# Allegro board 4CHOEI.brd
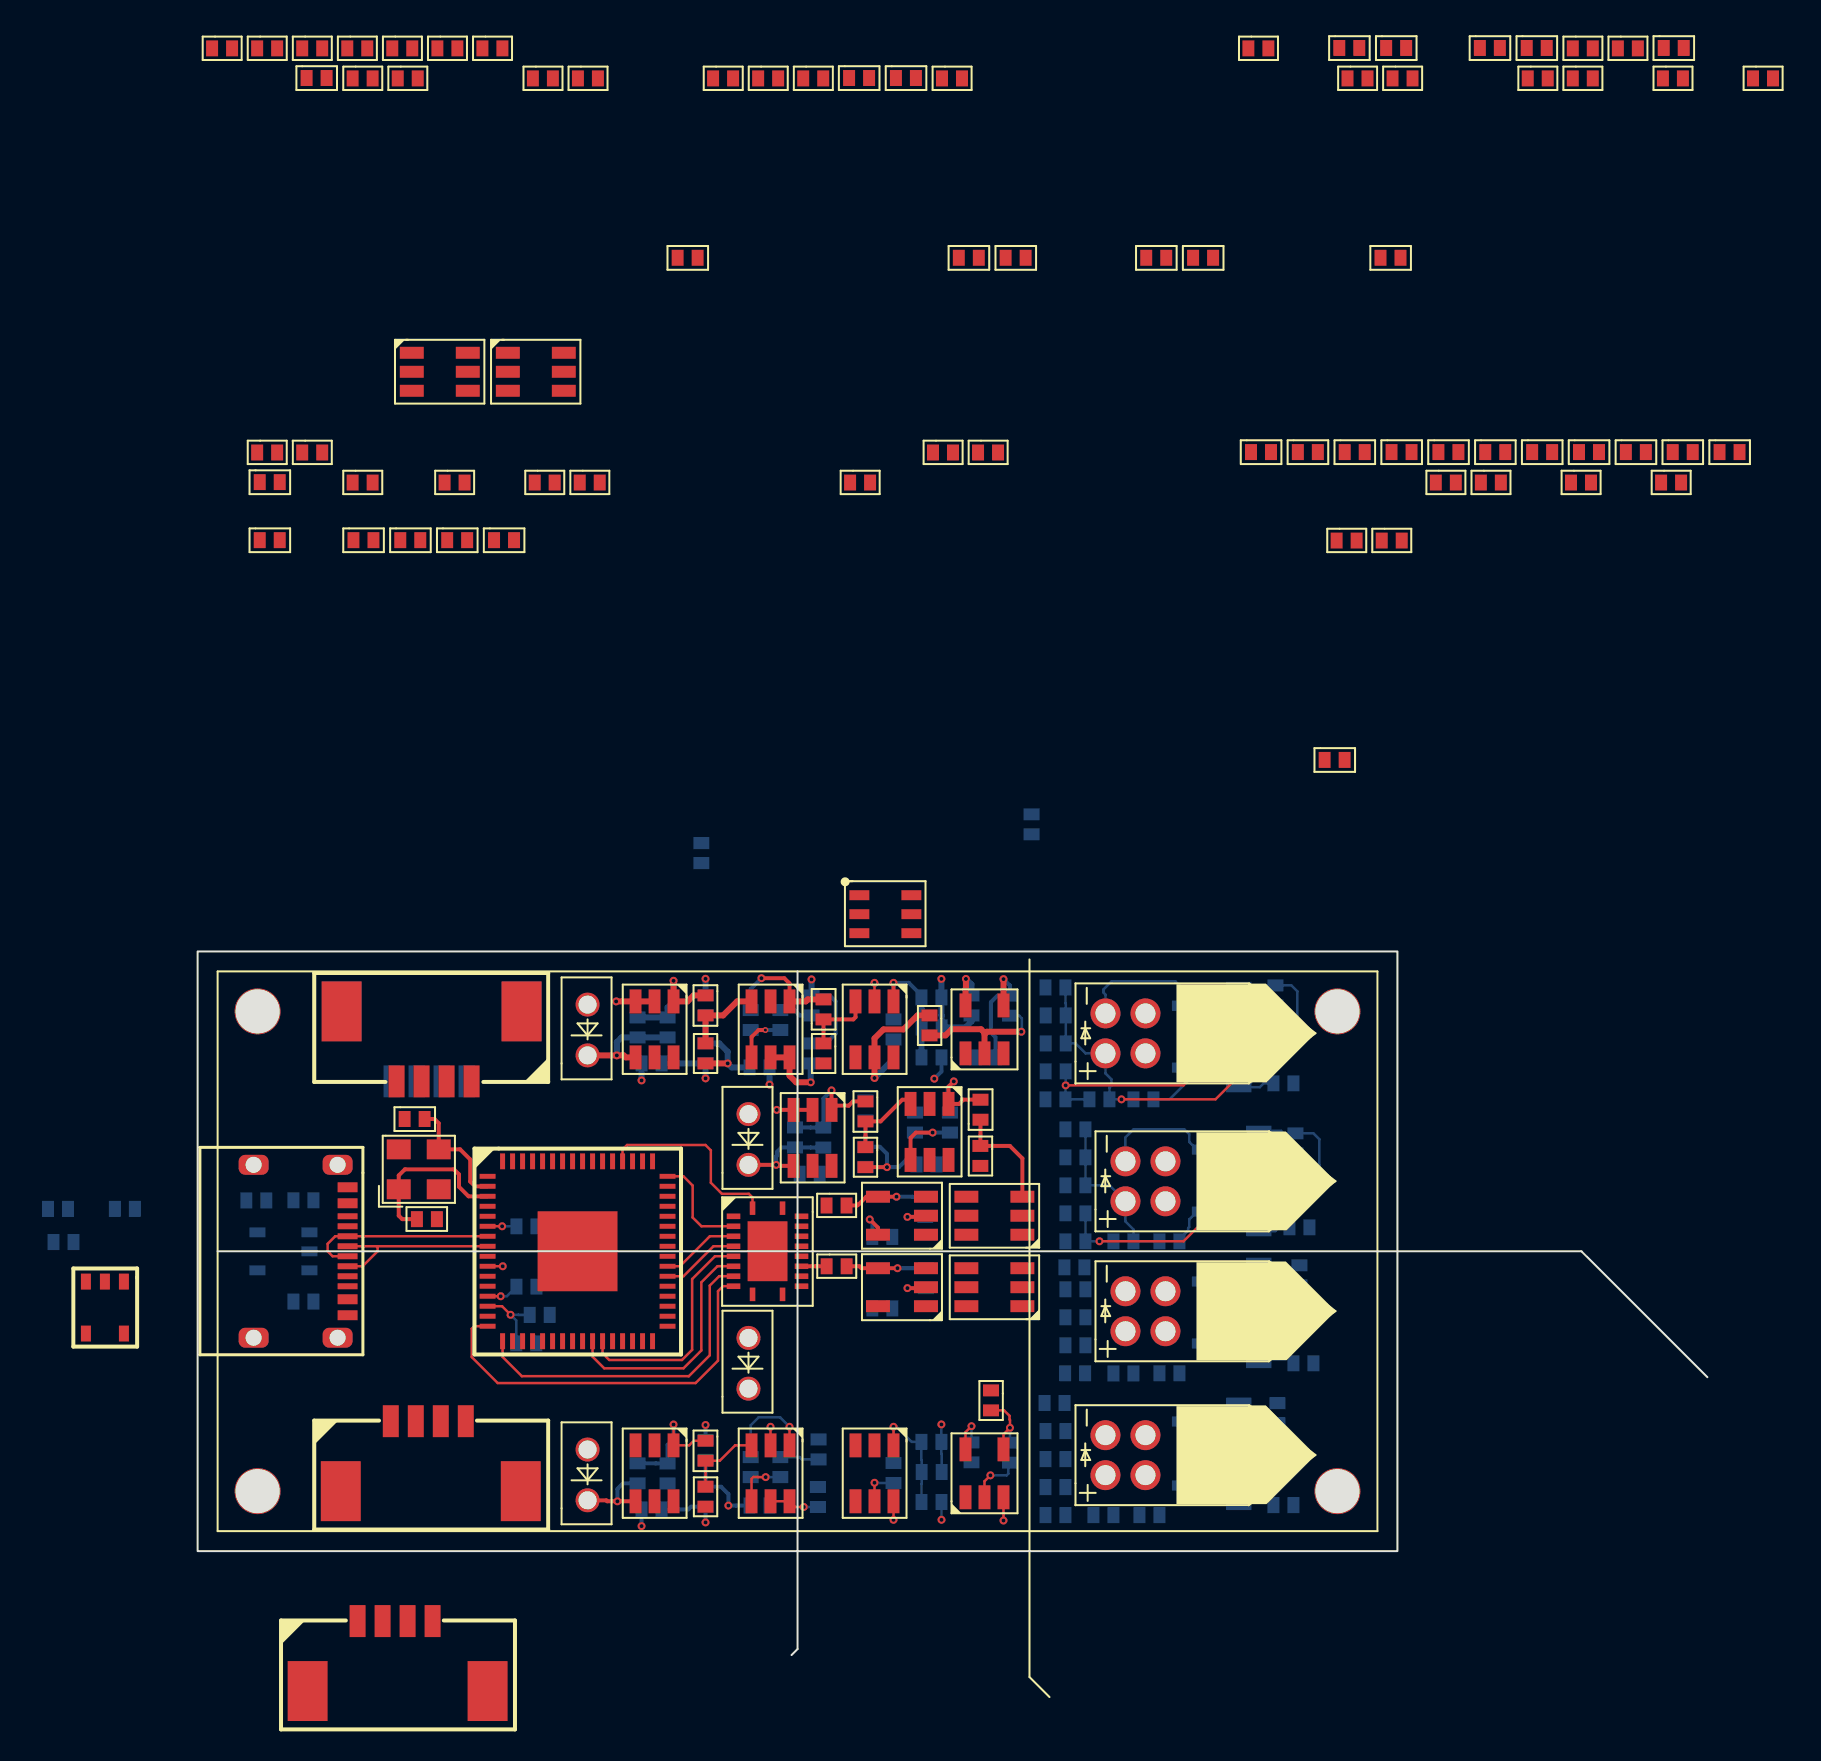
[diagram p0: board, top side]
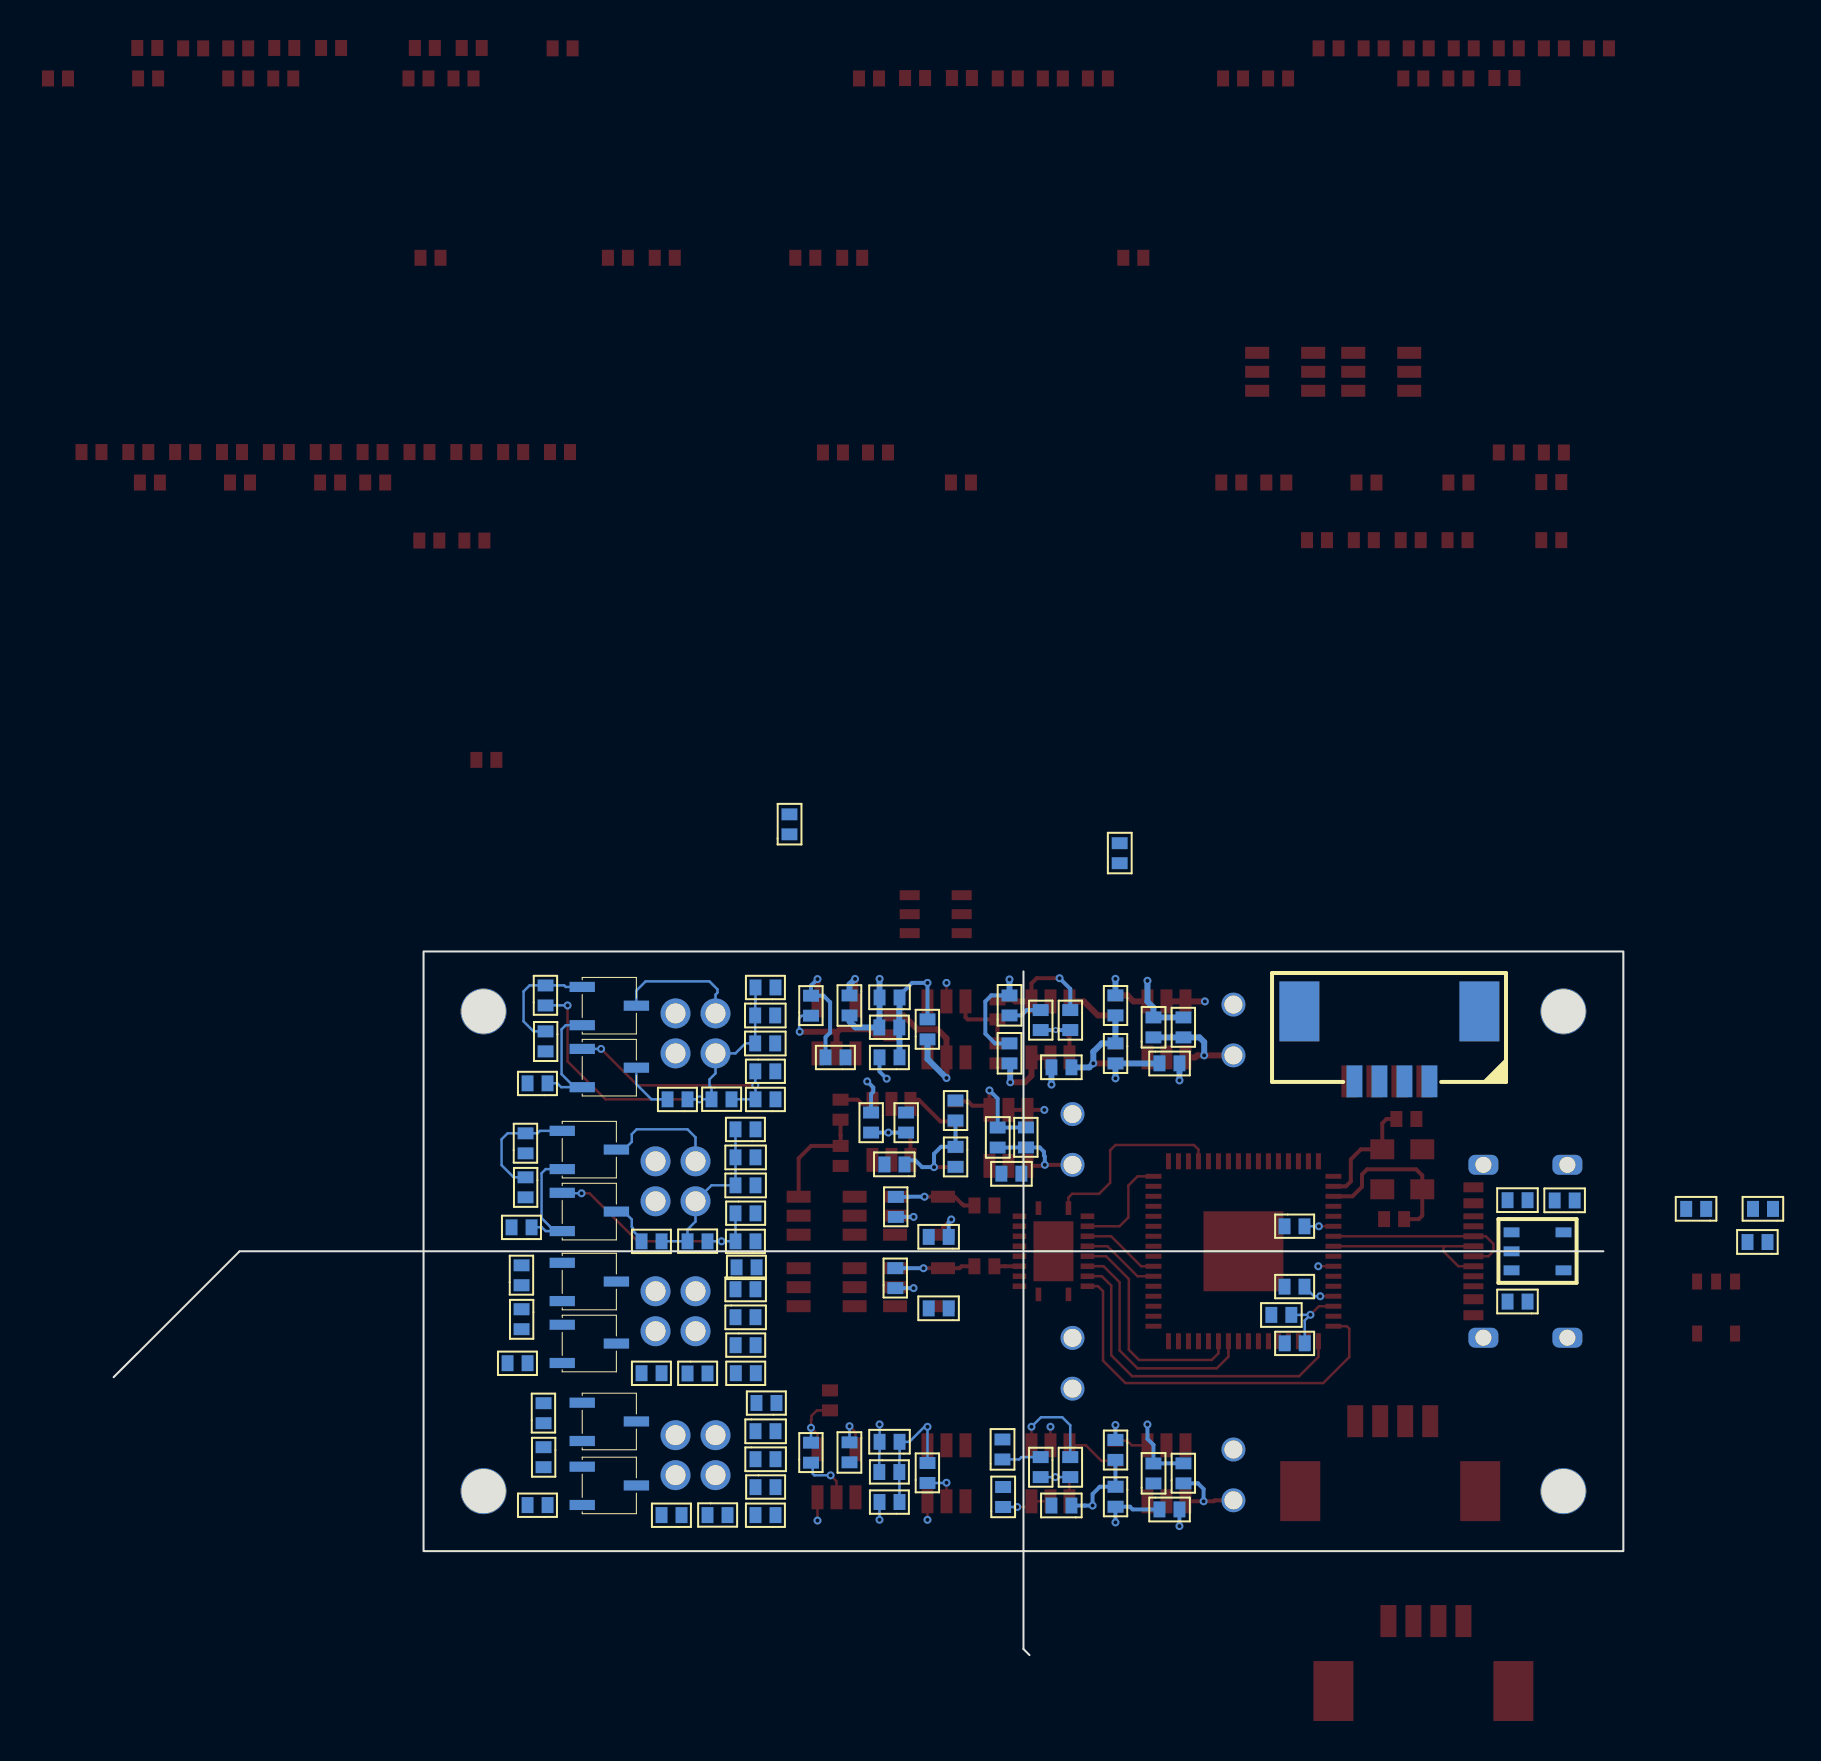
[diagram p1: board, bottom side, seen from below]

Outline 75.5 x 35.2 mm; copper layers: TOP, BOTTOM. Coordinates in mm from the lower left corner of the outline.
Outline path: rectangle 0,5.2 60,35.2 ; 1,20.2 69.2,20.2 75.5,13.9 ; 30,34.2 30,0.3 29.7,0

## Design rules (mm)
constraint set DEFAULT: min track width 0.127
net group TXD_A: nets N931488 N931856 N931860 N931892 TXD_A
net group TXD_B: nets N931500 N931876 N931880 N931896 TXD_B
net group TXD_C: nets N932344 N932712 N932716 N932748 TXD_C
net group TXD_D: nets N932356 N932732 N932736 N932752 TXD_D

## Placement (name value [footprint] x y rotation side)
C1  27pF  [C0402_SMT]  10.35 26.82 0 top
C2  27pF  [C0402_SMT]  11.96 21.81 180 top
C3  0.1uF  [C0402_SMT]  52.68 60.18 0 top
C4  0.1uF  [C0402_SMT]  4.79 22.75 0 bottom
C5  0.1uF  [C0402_SMT]  2.43 22.74 0 bottom
C6  4.7uF  [C0402_SMT]  12.48 55.77 0 top
C7  0.1uF  [C0402_SMT]  17.61 17.02 180 bottom
C8  0.1uF  [C0402_SMT]  7.79 55.77 0 top
C9  4.7uF  [C0402_SMT]  14.82 55.77 0 top
C10  0.1uF  [C0402_SMT]  76.11 60.18 0 top
C11  4.7uF  [C0402_SMT]  10.14 55.77 0 top
C12  0.1uF  [C0402_SMT]  73.77 60.18 0 top
C13  0.1uF  [C0402_SMT]  71.42 60.18 0 top
C14  0.1uF  [C0402_SMT]  69.08 60.18 0 top
C15  0.1uF  [C0402_SMT]  66.74 60.18 0 top
C16  0.1uF  [C0402_SMT]  64.39 60.18 0 top
C17  0.1uF  [C0402_SMT]  62.05 60.18 0 top
C18  0.1uF  [C0402_SMT]  59.71 60.18 0 top
C19  0.1uF  [C0402_SMT]  57.36 60.18 0 top
C20  0.1uF  [C0402_SMT]  55.02 60.18 0 top
C21  10uF  [C0402_SMT]  44.4 24.9 180 bottom
C22  10uF  [C0402_SMT]  44.4 23.5 180 bottom
C23  10uF  [C0402_SMT]  43.41 30.6 180 bottom
C24  10uF  [C0402_SMT]  43.41 32 180 bottom
C36  DNI  [C0402_SMT]  23.5 30.9 90 bottom
C38  0.1uF  [C0402_SMT]  30.7 32 90 bottom
C39  0.1uF  [C0402_SMT]  30.7 29.6 90 bottom
C42  0.1uF  [C0402_SMT]  31.3 31.8 90 top
C44  0.1uF  [C0402_SMT]  3.11 58.68 0 top
C45  0.1uF  [C0402_SMT]  36.2 32.9 0 bottom
C46  0.1uF  [C0402_SMT]  27.6 29.4 0 bottom
C47  0.1uF  [C0402_SMT]  23.2 29.6 180 bottom
C49  0.1uF  [C0402_SMT]  25.4 33 270 top
C50  0.1uF  [C0402_SMT]  38.7 33 270 bottom
C51  0.1uF  [C0402_SMT]  31.05 9.79 90 bottom
C52  DNI  [C0402_SMT]  23.5 8.59 90 bottom
C53  0.1uF  [C0402_SMT]  31.02 7.41 90 bottom
C54  0.1uF  [C0402_SMT]  36.2 10.67 0 bottom
C56  0.1uF  [C0402_SMT]  23.2 7.29 180 bottom
C57  0.1uF  [C0402_SMT]  38.7 10.64 270 bottom
C59  0.1uF  [C0402_SMT]  56.36 44.78 0 top
C60  0.1uF  [C0402_SMT]  25.4 10.72 270 top
C62  0.1uF  [C0402_SMT]  3.11 55.77 0 top
C63  0.1uF  [C0402_SMT]  27.6 7.48 0 bottom
C64  10uF  [C0402_SMT]  -7.48 22.32 0 bottom
C65  0.1uF  [C0402_SMT]  -7.21 20.66 0 bottom
C66  10uF  [C0402_SMT]  4.79 17.68 0 bottom
C67  10uF  [C0402_SMT]  -4.14 22.32 0 bottom
C68  10uF  [C0402_SMT]  43.4 11.2 180 bottom
C69  10uF  [C0402_SMT]  43.4 9.8 180 bottom
C70  10uF  [C0402_SMT]  44.4 18.3 180 bottom
C71  10uF  [C0402_SMT]  44.4 16.9 180 bottom
C72  0.1uF  [C0402_SMT]  73.32 80.4 0 top
C73  DNI  [C0402_SMT]  49.78 69.9 0 top
C74  10uF  [C0402_SMT]  47.44 69.9 0 top
C75  0.1uF  [C0402_SMT]  66.47 80.4 0 top
C76  0.1uF  [C0402_SMT]  64.12 80.4 0 top
C77  10uF  [C0402_SMT]  38.07 69.9 0 top
C78  0.1uF  [C0402_SMT]  33.74 17.34 0 bottom
C79  0.1uF  [C0402_SMT]  59.44 80.4 0 top
C80  0.1uF  [C0402_SMT]  57.09 80.4 0 top
C81  0.1uF  [C0402_SMT]  32.58 78.89 0 top
C82  10uF  [C0402_SMT]  40.41 69.9 0 top
C83  0.1uF  [C0402_SMT]  59.15 69.9 0 top
C84  0.1uF  [C0402_SMT]  5.45 78.89 0 top
C85  0.1uF  [C0402_SMT]  41.7 41.06 90 bottom
C86  DNI  [C0402_SMT]  31.29 25.39 90 bottom
C88  0.1uF  [C0402_SMT]  34.92 78.89 0 top
C89  0.1uF  [C0402_SMT]  25.19 39.62 90 bottom
C90  0.1uF  [C0402_SMT]  31.11 24.08 180 bottom
C91  0.1uF  [C0402_SMT]  33.74 20.92 0 bottom
C93  0.1uF  [C0402_SMT]  39.15 26.78 90 top
C94  0.1uF  [C0402_SMT]  33.4 27.7 270 top
C96  0.1uF  [C0402_SMT]  24.01 69.9 0 top
C97  0.1uF  [C0402_SMT]  35.95 24.54 0 bottom
J2  SIP-1x4  [SMD-1D25-4P-DEG0]  13.7 28.7 180 top
J3  SIP-1x4  [SMD-1D25-4P-DEG0]  9.7 28.7 0 bottom
J4  SIP-1x4  [SMD-1D25-4P-DEG0]  8 1.7 0 top
J5  SIP-1x4  [SMD-1D25-4P-DEG0]  9.66 11.7 0 top
L1  2.2uH  [L0402_SMT]  56.96 55.75 0 top
L2  2.2uH  [L0402_SMT]  59.21 55.75 0 top
LD1  LaserDiode  [AXIAL_2D0_4P]  46.4 22.7 90 top
LD2  LaserDiode  [AXIAL_2D0_4P]  45.4 30.1 90 top
LD3  LaserDiode  [AXIAL_2D0_4P]  45.4 9 90 top
LD4  LaserDiode  [AXIAL_2D0_4P]  46.4 16.2 90 top
NOREF  -  [unnamed]  57 8.2 0 top
NOREF#2  -  [unnamed]  57 32.2 0 top
NOREF#3  -  [unnamed]  3 8.2 0 top
NOREF#4  -  [unnamed]  3 32.2 0 top
PD2  Photodiode  [PD-THR-2P]  19.5 30 90 top
PD3  Photodiode  [PD-THR-2P]  19.5 7.74 90 top
PD4  Photodiode  [PD-THR-2P]  27.55 13.33 90 top
PD5  Photodiode  [PD-THR-2P]  27.55 24.52 90 top
Q2  2SC1815  [SOT23-3]  53.5 26.7 270 bottom
Q3  2SC1815  [SOT23-3]  53.5 23.6 270 bottom
Q4  2SC1815  [SOT23-3]  52.5 30.8 270 bottom
Q5  2SC1815  [SOT23-3]  52.5 33.9 270 bottom
Q6  2SC1815  [SOT23-3]  52.5 9.9 270 bottom
Q7  2SC1815  [SOT23-3]  52.5 13.1 270 bottom
Q8  2SC1815  [SOT23-3]  53.5 17 270 bottom
Q9  2SC1815  [SOT23-3]  53.5 20.1 270 bottom
R1  2K  [R0402_SMT]  7.75 58.66 0 top
R2  10K  [R0402_SMT]  12.35 58.66 0 top
R3  10K  [R0402_SMT]  16.86 58.66 0 top
R4  10K  [R0402_SMT]  19.11 58.66 0 top
R5  12K  [R0402_SMT]  16.95 21.45 180 bottom
R6  10K  [R0402_SMT]  15.94 15.6 0 bottom
R7  DNP  [R0402_SMT]  73.19 58.66 0 top
R8  0  [R0402_SMT]  61.92 58.66 0 top
R9  5.1K  [R0402_SMT]  43.4 20.7 0 bottom
R17  10K  [R0402_SMT]  27.66 32.27 270 bottom
R20  10K  [R0402_SMT]  29.14 32.27 270 bottom
R21  100K  [R0402_SMT]  25.39 30.6 270 top
R23  4.99K  [R0402_SMT]  25.4 30.6 270 bottom
R24  100K  [R0402_SMT]  31.3 30.6 270 top
R25  4.99K  [R0402_SMT]  25.4 33 270 bottom
R27  1K  [R0402_SMT]  36.6 32 270 top
R31  DNP  [R0402_SMT]  34.8 30.8 90 bottom
R33  560  [R0402_SMT]  54.9 23.9 270 bottom
R34  510  [R0402_SMT]  54.9 25.1 90 bottom
R35  51  [R0402_SMT]  54.6 21.4 0 bottom
R38  510  [R0402_SMT]  46.8 20.7 180 bottom
R43  51  [R0402_SMT]  48.1 20.7 0 bottom
R44  510  [R0402_SMT]  44.4 22.1 180 bottom
R45  510  [R0402_SMT]  45.6 27.8 180 bottom
R46  51  [R0402_SMT]  46.8 27.8 0 bottom
R47  510  [R0402_SMT]  53.9 32.5 90 bottom
R48  5.1K  [R0402_SMT]  42.4 27.8 0 bottom
R49  510  [R0402_SMT]  43.41 29.2 180 bottom
R50  560  [R0402_SMT]  53.9 31.2 270 bottom
R51  51  [R0402_SMT]  53.8 28.6 0 bottom
R66  0  [R0402_SMT]  16.95 18.43 180 bottom
R68  DNI  [R0402_SMT]  22 30.9 90 bottom
R69  4.99K  [R0402_SMT]  36.2 29.9 0 bottom
R70  4.99K  [R0402_SMT]  37.21 31.4 180 bottom
R71  DNP  [R0402_SMT]  40.62 31.99 90 bottom
R72  10K  [R0402_SMT]  29.14 9.9 270 bottom
R73  10K  [R0402_SMT]  27.66 9.9 270 bottom
R74  4.99K  [R0402_SMT]  36.2 7.66 0 bottom
R75  4.99K  [R0402_SMT]  37.21 9.16 180 bottom
R76  DNP  [R0402_SMT]  34.8 8.61 90 bottom
R77  DNI  [R0402_SMT]  22 8.59 90 bottom
R78  1K  [R0402_SMT]  68.68 58.66 0 top
R80  DNP  [R0402_SMT]  40.62 9.63 90 bottom
R81  100K  [R0402_SMT]  32.63 58.66 0 top
R82  100K  [R0402_SMT]  25.39 8.42 270 top
R83  4.99K  [R0402_SMT]  25.4 8.42 270 bottom
R84  4.99K  [R0402_SMT]  25.4 10.76 270 bottom
R85  DNP  [R0402_SMT]  2.98 60.16 0 top
R86  DNP  [R0402_SMT]  5.23 60.16 0 top
R87  0  [R0402_SMT]  64.17 58.66 0 top
R88  5.1K  [R0402_SMT]  36.77 60.16 0 top
R89  5.1K  [R0402_SMT]  39.03 60.16 0 top
R90  DNP  [R0402_SMT]  42.4 33.4 0 bottom
R91  DNP  [R0402_SMT]  42.35 12.61 0 bottom
R92  510  [R0402_SMT]  45.8 7 180 bottom
R93  51  [R0402_SMT]  47.1 7 0 bottom
R94  510  [R0402_SMT]  54 11.6 90 bottom
R95  5.1K  [R0402_SMT]  42.4 7 0 bottom
R96  510  [R0402_SMT]  43.4 8.4 180 bottom
R97  560  [R0402_SMT]  54 10.4 270 bottom
R98  51  [R0402_SMT]  53.8 7.5 0 bottom
R99  510  [R0402_SMT]  46.8 14.09 180 bottom
R100  51  [R0402_SMT]  48.1 14.1 0 bottom
R101  510  [R0402_SMT]  55.1 18.5 90 bottom
R102  5.1K  [R0402_SMT]  43.38 14.1 0 bottom
R103  510  [R0402_SMT]  44.4 15.5 180 bottom
R104  560  [R0402_SMT]  55.1 17.3 270 bottom
R105  51  [R0402_SMT]  54.8 14.6 0 bottom
R106  DNP  [R0402_SMT]  43.4 26.3 0 bottom
R107  DNP  [R0402_SMT]  43.35 19.4 0 bottom
R108  DNP  [R0402_SMT]  66.52 78.87 0 top
R109  10K  [R0402_SMT]  7.75 78.87 0 top
R110  10K  [R0402_SMT]  10.01 78.87 0 top
R111  4.99K  [R0402_SMT]  25.78 78.87 0 top
R112  4.99K  [R0402_SMT]  28.03 78.87 0 top
R113  DNP  [R0402_SMT]  68.77 78.87 0 top
R114  DNI  [R0402_SMT]  52.55 80.38 0 top
R115  1K  [R0402_SMT]  57.5 78.87 0 top
R117  DNP  [R0402_SMT]  36.41 18.36 90 bottom
R118  100K  [R0402_SMT]  16.77 78.87 0 top
R119  100K  [R0402_SMT]  19.02 78.87 0 top
R120  4.99K  [R0402_SMT]  30.28 78.87 0 top
R121  4.99K  [R0402_SMT]  68.77 80.38 0 top
R122  10K  [R0402_SMT]  35.87 27.14 270 bottom
R123  10K  [R0402_SMT]  37.62 27.14 270 bottom
R124  4.99K  [R0402_SMT]  71.02 80.38 0 top
R125  4.99K  [R0402_SMT]  37.22 78.87 0 top
R126  DNP  [R0402_SMT]  73.28 78.87 0 top
R127  DNI  [R0402_SMT]  29.88 25.4 90 bottom
R128  1K  [R0402_SMT]  59.76 78.87 0 top
R130  DNP  [R0402_SMT]  36.38 21.92 90 bottom
R131  100K  [R0402_SMT]  39.14 25.47 270 top
R132  100K  [R0402_SMT]  33.39 25.41 270 top
R133  4.99K  [R0402_SMT]  33.4 25.43 270 bottom
R134  4.99K  [R0402_SMT]  33.4 27.75 270 bottom
R135  DNP  [R0402_SMT]  77.78 78.87 0 top
R136  DNP  [R0402_SMT]  0.72 80.38 0 top
R137  0  [R0402_SMT]  39.68 13.24 270 top
R138  0  [R0402_SMT]  38.9 29.9 0 bottom
R139  0  [R0402_SMT]  31.46 19.45 0 top
R140  0  [R0402_SMT]  31.45 22.49 0 top
R141  DNP  [R0402_SMT]  2.98 80.38 0 top
R142  DNP  [R0402_SMT]  5.23 80.38 0 top
R143  DNP  [R0402_SMT]  7.48 80.38 0 top
R144  DNP  [R0402_SMT]  9.74 80.38 0 top
R145  DNP  [R0402_SMT]  11.99 80.38 0 top
R146  DNP  [R0402_SMT]  14.24 80.38 0 top
U1  FT4232HQ-REEL  [QFN-64-EP]  19 20.2 0 top
U2  93LC56BT-I/OT  [SOT-23-6]  33.09 38.01 0 top
U3  TYPE-C 16PIN 2MD(073)  [USB-TYPE-C-16P-SMD-HOR]  7.5 20.2 270 top
U4  XC6220B331MR-G  [SOT-25-5]  4.29 20.2 180 bottom
U5  TXS0108ERGYR  [VQFN-20]  28.5 20.2 270 top
U14  TLV3501AIDBVR  [SOT-23-6-L2D9-W1D6-PD0D95-CD2D8-MM]  34.8 32.7 270 top
U15  OPA357AIDBVR  [SOT-23-6-L2D9-W1D6-PD0D95-CD2D8-MM]  29.6 32.7 270 top
U17  OPA357AIDBVR  [SOT-23-6-L2D9-W1D6-PD0D95-CD2D8-MM]  23.8 32.7 270 top
U18  SN74AHC1G14DBVR  [SOT-23-5]  38.4 30.1 90 top
U19  TLV3501AIDBVR  [SOT-23-6-L2D9-W1D6-PD0D95-CD2D8-MM]  34.8 10.49 270 top
U20  SN74AHC1G14DBVR  [SOT-23-5]  38.4 7.89 90 top
U21  OPA357AIDBVR  [SOT-23-6-L2D9-W1D6-PD0D95-CD2D8-MM]  29.6 10.49 270 top
U22  OPA357AIDBVR  [SOT-23-6-L2D9-W1D6-PD0D95-CD2D8-MM]  23.8 10.49 270 top
U23  XC6220B181MR  [SOT-25-5]  -4.64 17.38 270 top
U24  TLV3501AIDBVR  [SOT-23-6-L2D9-W1D6-PD0D95-CD2D8-MM]  41.24 17.45 180 top
U25  SN74AHC1G14DBVR  [SOT-23-5]  36.42 17.45 180 top
U26  OPA357AIDBVR  [SOT-23-6-L2D9-W1D6-PD0D95-CD2D8-MM]  15.51 65.15 0 top
U27  OPA357AIDBVR  [SOT-23-6-L2D9-W1D6-PD0D95-CD2D8-MM]  10.71 65.15 0 top
U28  TLV3501AIDBVR  [SOT-23-6-L2D9-W1D6-PD0D95-CD2D8-MM]  41.24 21.03 180 top
U29  SN74AHC1G14DBVR  [SOT-23-5]  36.42 21.03 180 top
U30  OPA357AIDBVR  [SOT-23-6-L2D9-W1D6-PD0D95-CD2D8-MM]  37.55 27.57 270 top
U31  OPA357AIDBVR  [SOT-23-6-L2D9-W1D6-PD0D95-CD2D8-MM]  31.7 27.27 270 top
Y1  CRYSTAL-12.0MHz  [SMD2520-4P]  11.06 24.34 0 top

## Library data of the parts
C1-C24 C36 C38 C39 C42 C44-C47 C49-C54 C56 C57 C59 C60 C62-C86 C88-C91 C93 C94 C96 C97 = CAP NP
J2-J5 = SIP-1x4
L1 L2 = INDUCTOR
LD1-LD4 = LaserDiode
PD2-PD5 = Photodiode
Q2-Q9 = 2SC1815
R1-R8 R17 R20 R21 R23-R25 R27 R31 R66 R68-R78 R80-R89 R108-R115 R117-R128 R130-R146 = R
R9 R33 R34 R38 R44 R45 R47-R50 R92 R94-R97 R99 R101-R104 = R: signal model: DEFAULT_RESISTOR_510.000000OHM_2_1
R35 R43 R46 R51 R90 R91 R93 R98 R100 R105-R107 = R: signal model: DEFAULT_RESISTOR_40.000000OHM_2_1
U1 = FT4232HQ-REEL
U2 = 93LC56BT-I/OT
U3 = USB-TYPE-C
U4 = XC6220B331MR-G
U5 = TXS0108ERGYR
U14 U19 U24 U28 = TLV3501AIDBVR
U15 U17 U21 U22 U26 U27 U30 U31 = OPA357AIDBVR
U18 U20 U25 U29 = SN74AHC1G14DBVR
U23 = XC6220B181MR
Y1 = CRYSTAL

## Footprints (pads in the part's own frame, mm; a bottom-side part is the same pattern mirrored in y, then rotated)
AXIAL_2D0_4P
  round 1.5 hole 1: 1(0,0) 2(2,0) 3(0,-2) 4(2,-2)
C0402_SMT
  rect 0.6x0.8 smd: 1(0,0) 2(1,0)
L0402_SMT
  rect 0.6x0.8 smd: 1(0,0) 2(1,0)
PD-THR-2P
  round 1.2 hole 0.9: 1(0,0) 2(2.54,0)
QFN-64-EP
  rect 0.8x0.25 smd: 1(-4.5,3.75) 2(-4.5,3.25) 3(-4.5,2.75) 4(-4.5,2.25) 5(-4.5,1.75) 6(-4.5,1.25) 7(-4.5,0.75) 8(-4.5,0.25) 9(-4.5,-0.25) 10(-4.5,-0.75) 11(-4.5,-1.25) 12(-4.5,-1.75) 13(-4.5,-2.25) 14(-4.5,-2.75) 15(-4.5,-3.25) 16(-4.5,-3.75) 33(4.5,-3.75) 34(4.5,-3.25) 35(4.5,-2.75) 36(4.5,-2.25) 37(4.5,-1.75) 38(4.5,-1.25) 39(4.5,-0.75) 40(4.5,-0.25) 41(4.5,0.25) 42(4.5,0.75) 43(4.5,1.25) 44(4.5,1.75) 45(4.5,2.25) 46(4.5,2.75) 47(4.5,3.25) 48(4.5,3.75)
  rect 0.25x0.8 smd: 17(-3.75,-4.5) 18(-3.25,-4.5) 19(-2.75,-4.5) 20(-2.25,-4.5) 21(-1.75,-4.5) 22(-1.25,-4.5) 23(-0.75,-4.5) 24(-0.25,-4.5) 25(0.25,-4.5) 26(0.75,-4.5) 27(1.25,-4.5) 28(1.75,-4.5) 29(2.25,-4.5) 30(2.75,-4.5) 31(3.25,-4.5) 32(3.75,-4.5) 49(3.75,4.5) 50(3.25,4.5) 51(2.75,4.5) 52(2.25,4.5) 53(1.75,4.5) 54(1.25,4.5) 55(0.75,4.5) 56(0.25,4.5) 57(-0.25,4.5) 58(-0.75,4.5) 59(-1.25,4.5) 60(-1.75,4.5) 61(-2.25,4.5) 62(-2.75,4.5) 63(-3.25,4.5) 64(-3.75,4.5)
  rect 4x4 smd: 65(0,0)
R0402_SMT
  rect 0.6x0.8 smd: 1(0,0) 2(1,0)
SMD2520-4P
  rect 1.2x1 smd: 1(-1,-1.04) 2(1,-1.04) 3(1,0.96) 4(-1,0.96)
SMD-1D25-4P-DEG0
  rect 0.8x1.6 smd: 1(0,0) 2(1.25,0) 3(2.5,0) 4(3.75,0)
  rect 2x3 smd: 5(6.5,-3.5) 6(-2.5,-3.5)
SOT23-3
  rect 0.51x1.27 smd: 1(0.476,0.434) 2(2.391,0.434) 3(1.415,3.142)
SOT-23-5
  rect 1.2x0.6 smd: 1(0,0) 2(0,-0.95) 3(0,-1.9) 4(2.4,-1.9) 5(2.4,0)
SOT-23-6
  rect 1x0.5 smd: 1(0,0) 2(0,-0.95) 3(0,-1.9) 4(2.6,-1.9) 5(2.6,-0.95) 6(2.6,0)
SOT-23-6-L2D9-W1D6-PD0D95-CD2D8-MM
  rect 1.2x0.6 smd: 1(0,0) 2(0,-0.95) 3(0,-1.9) 4(2.8,-1.9) 5(2.8,-0.95) 6(2.8,0)
SOT-25-5
  rect 0.8x0.5 smd: 1(-1.3,0.95) 2(-1.3,0) 3(-1.3,-0.95) 4(1.3,-0.95) 5(1.3,0.95)
unnamed
  round 2.3 hole 2.2 unplated: (0,0)
USB-TYPE-C-16P-SMD-HOR
  rect 0.5x1 smd: 1(-3.2,0) 2(-2.4,0) 11(2.4,0) 12(3.2,0)
  rect 0.3x1 smd: 3(-1.75,0) 4(-1.25,0) 5(-0.75,0) 6(-0.25,0) 7(0.25,0) 8(0.75,0) 9(1.25,0) 10(1.75,0)
  rrect 1x1.5 hole 0.8: 13(4.325,-0.5) 14(4.325,-4.7) 15(-4.325,-4.7) 16(-4.325,-0.5)
VQFN-20
  rect 0.68x0.28 smd: 1(-2.157,-0.75) 10(2.158,-0.75) 11(2.158,0.75) 20(-2.157,0.75)
  rect 0.28x0.68 smd: 2(-1.75,-1.7) 3(-1.25,-1.7) 4(-0.75,-1.7) 5(-0.25,-1.7) 6(0.25,-1.7) 7(0.75,-1.7) 8(1.25,-1.7) 9(1.75,-1.7) 12(1.75,1.7) 13(1.25,1.7) 14(0.75,1.7) 15(0.25,1.7) 16(-0.25,1.7) 17(-0.75,1.7) 18(-1.25,1.7) 19(-1.75,1.7)
  rect 3x2 smd: EPAD(0,0)

## Nets
GND: C1.1 C2.1 C3.1 C4.1 C5.2 C6.2 C7.1 C8.1 C9.1 C10.1 C11.1 C12.1 C13.1 C14.1 C15.1 C16.1 C17.1 C18.1 C19.2 C20.2 C21.2 C22.2 C23.2 C24.2 C38.2 C39.2 C44.2 C45.2 C46.2 C47.2 C50.2 C51.2 C53.2 C54.2 C56.2 C57.2 C62.2 C63.2 C64.1 C65.1 C66.1 C67.1 C68.2 C69.2 C70.2 C71.2 C72.2 C74.2 C75.2 C76.2 C77.2 C78.2 C79.2 C82.2 C83.2 C84.2 C85.2 C88.2 C89.2 C90.2 C91.2 C96.2 C97.2 J2.4 J2.5 J2.6 J3.4 J3.5 J3.6 J4.4 J4.5 J4.6 J5.4 J5.5 J5.6 PD2.2 PD3.2 PD4.2 PD5.2 R5.1 R24.2 R25.1 R33.2 R35.2 R44.2 R49.2 R50.2 R51.2 R66.1 R70.1 R75.1 R81.2 R84.1 R88.2 R89.2 R96.2 R97.2 R98.2 R103.2 R104.2 R105.2 R112.1 R118.2 R121.1 R125.1 R131.2 R134.1 U1.1 U1.5 U1.10 U1.11 U1.15 U1.25 U1.35 U1.47 U1.51 U1.65 U2.2 U3.1 U3.12 U3.13 U3.14 U3.15 U3.16 U4.2(VSS) U5.11 U5.EPAD U14.2(V-) U14.6 U15.2(V-) U17.2(V-) U17.3 U18.3 U19.2(V-) U19.6 U20.3 U21.2(V-) U22.2(V-) U22.3 U23.2(VSS) U24.2(V-) U24.6 U25.3 U26.2(V-) U27.2(V-) U27.3 U28.2(V-) U28.6 U29.3 U30.2(V-) U31.2(V-) U31.3 Y1.2 Y1.4
VBUS: C4.2 C64.2 C65.2 C66.2 U3.2 U3.11(VBUS2) U4.1 U4.3 U23.1 U23.3
VDD18: C6.1 C12.2 C13.2 C14.2 R7.2 R86.2 R87.1 U1.12 U1.37 U1.64
VDD33: C3.2 C5.1 C15.2 C16.2 C17.2 C18.2 C19.1 C39.1 C44.1 C47.1 C50.1 C53.1 C56.1 C57.1 C62.1 C74.1 C76.1 C77.1 C78.1 C79.1 C82.1 C83.1 C89.1 C90.1 C91.1 C96.1 J2.1 J3.1 J4.1 J5.1 L1.1 L2.1 R2.2 R3.2 R4.2 R6.2 R8.2 R23.2 R69.2 R74.2 R83.2 R90.1 R91.1 R106.1 R107.1 R111.2 R120.2 R124.2 R133.2 U1.20 U1.31 U1.42 U1.50 U1.56 U2.6(VCC) U4.5 U5.2 U5.10 U14.4 U15.5 U15.6 U17.5 U17.6 U18.5 U19.4 U20.5 U21.5 U21.6 U22.5 U22.6 U24.4 U25.5 U26.5 U26.6 U27.5 U27.6 U28.4 U29.5 U30.5 U30.6 U31.5 U31.6
RXD_A: R136.2 R137.1 U5.18
RXD_B: R138.1 R144.2 U5.16
RXD_C: R139.1 R142.2 U5.14
RXD_D: R140.1 R146.2 U5.12
RXDA: U1.17 U5.8
RXDB: U1.27 U5.6
RXDC: U1.39 U5.4
RXDD: U1.52 U5.1
TXD_A: R95.1 R135.2 U5.20
TXD_B: R48.1 R143.2 U5.17
TXD_C: R102.1 R141.2 U5.15
TXD_D: R9.1 R145.2 U5.13
TXDA: U1.16 U5.9
TXDB: U1.26 U5.7
TXDC: U1.38 U5.5
TXDD: U1.48 U5.3
N00582: R4.1 U1.63 U2.5
N00604: R3.1 U1.62 U2.4
N00616: R1.2 U1.61 U2.3
N00760: R1.1 R2.1 U2.1
N01302: U1.8 U3.6 U3.8
N01314: U1.7 U3.5 U3.7
N01942: R86.1 U1.49(VREGOUT)
N02617: R5.2 U1.6
N02788: C7.2 R6.1 U1.14
N03863: C8.2 C9.2 L1.2 U1.9
N03880: C10.2 C11.2 L2.2 U1.4
N15178: C20.1 R7.1 R8.1 U5.19(VCCB)
N619829: R66.2 U1.13
N625108: C36.1 PD2.1 R68.1 U17.4
N625141: C36.2 C49.1 R68.2 U17.1
N797485: R17.2 R20.2 U15.4
N797493: C42.2 R17.1 U15.1
N797585: C45.1 R31.2 R69.1 R70.2 U14.1
N797593: R27.1 R31.1 U14.5
N797877: C42.1 R24.1 U14.3
N797953: C49.2 R21.1 U15.3
N798113: C46.1 R21.2 R23.1 R25.2
N804959: C38.1 R20.1
N809789: R27.2 R71.1 U18.2
N814486: R71.2 R138.2 U18.4(Y)
N820703: C51.1 R72.1
N820707: R72.2 R73.2 U21.4
N820719: C59.2 R73.1 U21.1
N820731: C54.1 R74.1 R75.2 R76.2 U19.1
N820747: C52.1 PD3.1 R77.1 U22.4
N820755: C52.2 C60.1 R77.2 R85.2 U22.1
N820875: R76.1 R78.1 U19.5
N821237: R78.2 R80.1 U20.2
N821249: R80.2 R137.2 U20.4(Y)
N821327: C59.1 R81.1 R85.1 U19.3
N821379: C60.2 R82.1 U21.3
N821555: C63.1 R82.2 R83.1 R84.2
N830568: C67.2 R87.2 U23.5
N884584: R89.1 U3.4
N886048: R88.1 U3.10
N887669: C1.2 U1.2 Y1.3
N887689: C2.2 U1.3 Y1.1
N909852: C73.2 C81.1 R108.2 R114.2 U27.1
N909860: C80.1 R108.1 R118.1 U24.3
N909984: C72.1 R109.1
N909988: R109.2 R110.2 U26.4
N910000: C80.2 R110.1 U26.1
N910012: C75.1 R111.1 R112.2 R113.2 U24.1
N910028: C73.1 PD4.1 R114.1 U27.4
N910156: R113.1 R115.1 U24.5
N910546: R115.2 R117.1 U25.2
N910558: R117.2 R139.2 U25.4(Y)
N910688: C81.2 R119.1 U26.3
N910864: C84.1 R119.2 R120.1 R121.2
N911060: C85.1 R122.1
N911064: R122.2 R123.2 U30.4
N911076: C93.2 R123.1 U30.1
N911088: C88.1 R124.1 R125.2 R126.2 U28.1
N911104: C86.1 PD5.1 R127.1 U31.4
N911112: C86.2 C94.1 R127.2 U31.1
N911232: R126.1 R128.1 U28.5
N911614: R128.2 R130.1 U29.2
N911626: R130.2 R140.2 U29.4(Y)
N911704: C93.1 R131.1 U28.3
N911756: C94.2 R132.1 U30.3
N911932: C97.1 R132.2 R133.1 R134.2
N931488: C68.1 C69.1 LD3.1 R91.2 R92.1 R93.1 R94.1
N931500: C23.1 C24.1 LD2.1 R45.1 R46.1 R47.1 R90.2
N931812: LD3.2 Q7.3
N931828: LD2.2 Q5.3
N931856: Q6.1 R92.2 R95.2 R96.1
N931860: Q6.3 R93.2
N931876: Q4.1 R45.2 R48.2 R49.1
N931880: Q4.3 R46.2
N931892: Q7.1 R94.2 R97.1
N931896: Q5.1 R47.2 R50.1
N932124: Q6.2(E) Q7.2(E) R98.1
N932164: Q4.2(E) Q5.2(E) R51.1
N932344: C70.1 C71.1 LD4.1 R99.1 R100.1 R101.1 R107.2
N932356: C21.1 C22.1 LD1.1 R34.1 R38.1 R43.1 R106.2
N932668: LD4.2 Q9.3
N932684: LD1.2 Q2.3
N932712: Q8.1 R99.2 R102.2 R103.1
N932716: Q8.3 R100.2
N932732: Q3.1 R9.2 R38.2 R44.1
N932736: Q3.3 R43.2
N932748: Q9.1 R101.2 R104.1
N932752: Q2.1 R33.1 R34.2
N932980: Q8.2(E) Q9.2(E) R105.1
N933020: Q2.2(E) Q3.2(E) R35.1
N943640: J2.2 R135.1
N943662: J2.3 R136.1
N943770: J3.2 R141.1
N943792: J3.3 R142.1
N945293: J4.2 R143.1
N945315: J4.3 R144.1
N945423: J5.2 R145.1
N945445: J5.3 R146.1

Pads without a net: LD1 3 4; LD2 3 4; LD3 3 4; LD4 3 4; U1 18 19 21 22 23 24 28 29 30 32 33 34 36 40 41 43 44 45 46 53 54 55 57 58 59 60; U3 3 9; U4 4; U18 1; U20 1; U23 4; U25 1; U29 1

## Via types
v1: diameter 0.4, hole 0.2, TOP to BOTTOM, 59 vias
v2: diameter 0.3, hole 0.15, TOP to BOTTOM, 1 via

## Routing (per net, layer and track width the routed paths; a pad name or vN(x,y) marks a point on that pad's centre or on a via; arc(x,y) is an arc through that point)
GND: length 24.4
  TOP w0.127: U1.10 v1(15.26,19.45) ; U20.3 v1(40.3,6.73) ; U14.2 v1(33.85,33.63) ; U19.6 v1(34.8,6.77) ; U21.2 v1(28.65,11.42)
  TOP w0.2: U31.2 v1(28.96,27.27)
  TOP w0.3: U17.2 U17.3 v1(20.93,32.7)
  BOTTOM w0.127: R75.1 37.21,10.06 37.2,10.08 C54.2 v1(37.2,11.54)
  BOTTOM w0.2: C38.2 31.61,33 31.91,32.7 31.91,31.08 31.42,30.6 C39.2 ; C56.2 v1(22.2,6.45) ; R84.1 v1(25.4,11.51)
  BOTTOM w0.3: C47.2 v1(22.2,28.75) ; C46.2 v1(28.6,28.54) ; C38.2 v1(30.7,33.8) ; R25.1 v1(25.4,33.83) ; C50.2 38.7,31.7 38.4,31.4 R70.1 37.21,31.99 37.2,32.01 C45.2 v1(37.2,33.83)
VDD33: length 20.8
  TOP w0.127: v1(30.31,7.41) 29.89,7.41 U21.6 U21.5 ; v1(38.7,11.45) 38.4,11.15 U20.5
  TOP w0.2: U29.5 34.02,21.38 v1(33.61,21.79)
  TOP w0.3: U18.5 38.4,33.31 38.42,33.33 v1(38.42,33.83) ; v1(30.66,28.66) 29.93,28.66 29.6,28.98 U15.6 U15.5
  BOTTOM w0.127: C53.1 v1(30.31,7.41) ; R74.2 v1(37.2,6.77) ; C57.1 v1(38.7,11.45)
  BOTTOM w0.2: v1(36.84,28.83) 37.2,29.19 R69.2 ; v1(25.4,6.64) R83.2 24.68,7.42 24.54,7.29 C56.1 ; v1(33.61,21.79) 33.74,21.67 C91.1
  BOTTOM w0.3: v1(38.42,33.83) 38.7,33.55 C50.1 ; v1(30.66,28.66) 30.66,29.56 C39.1 ; C47.1 R23.2 v1(25.4,28.85)
RXD_C: length 1.3
  TOP w0.2: R139.1 30.93,19.45 30.93,19.45 U5.14
RXDA: length 16.8
  TOP w0.127: U1.17 15.25,14.92 16.22,13.95 24.56,13.95 25.61,15 25.61,18.48 26.08,18.95 U5.8
RXDB: length 11.5
  TOP w0.127: U1.27 20.25,15.1 20.58,14.76 24.22,14.76 24.73,15.27 24.73,18.81 25.87,19.95 U5.6
RXDC: length 3.9
  TOP w0.127: U1.39 24.11,19.45 25.62,20.95 U5.4
RXDD: length 9.8
  TOP w0.127: U1.52 21.25,25.29 21.48,25.52 25.4,25.52 25.66,25.25 25.66,23.63 26.22,23.08 27.56,23.08 27.75,22.89 U5.1
TXDA: length 19.9
  TOP w0.127: U1.16 13.83,16.45 13.71,16.32 13.71,14.91 15.01,13.61 24.9,13.61 26.02,14.73 26.02,18.2 26.27,18.45 U5.9
TXDB: length 12.2
  TOP w0.127: U1.26 19.75,14.93 20.33,14.34 24.3,14.34 25.19,15.24 25.19,18.65 25.99,19.45 U5.7
TXDC: length 3.9
  TOP w0.127: U1.38 24.3,18.95 25.8,20.45 U5.5
TXDD: length 5.3
  TOP w0.127: U1.48 24.29,23.95 24.75,23.49 24.75,21.89 25.19,21.45 U5.3
N01302: length 9.1
  TOP w0.127: U3.8 8.25,19.45 9,20.2 9,20.39 8.94,20.45 ; U1.8 8.94,20.45 ; 8.94,20.45 U3.6
N01314: length 9.6
  TOP w0.127: U3.7 6.75,19.95 6.5,20.2 6.5,20.57 6.88,20.95 U3.5 U1.7
N02617: length 1.4
  TOP w0.127: U1.6 v1(15.23,21.45)
  BOTTOM w0.127: R5.2 15.94,21.45 v1(15.23,21.45)
N02788: length 3.8
  TOP w0.127: U1.14 15.22,17.45 v1(15.65,17.02)
  BOTTOM w0.127: R6.1 15.94,16.74 v1(15.65,17.02) 16.04,17.02 16.05,17.02 C7.2
N619829: length 1.6
  TOP w0.127: U1.13 v1(15.16,17.95)
  BOTTOM w0.127: R66.2 15.47,17.95 v1(15.16,17.95)
N625108: length 5.7
  TOP w0.3: U17.4 21.41,29.9 21.31,30 v1(20.96,30) PD2.1
  BOTTOM w0.3: v1(20.96,30) 20.96,30.66 21.2,30.9 R68.1 C36.1
N625141: length 6.2
  TOP w0.3: v1(23.8,33.73) U17.1 24.5,32.7 24.8,33 C49.1
  BOTTOM w0.3: v1(23.8,33.73) 23.8,32.69 23.5,32.39 C36.2 R68.2
N797485: length 3.3
  TOP w0.2: U15.4 27.7,30.92 28.05,31.27 v2(28.39,31.27)
  BOTTOM w0.2: R20.2 v2(28.39,31.27) R17.2
N797493: length 6
  TOP w0.2: U15.1 29.6,33.6 29.34,33.86 v1(28.2,33.86)
  TOP w0.3: U15.1 30.41,32.7 30.51,32.8 C42.2
  BOTTOM w0.2: v1(28.2,33.86) 27.66,33.33 R17.1
N797585: length 7.5
  TOP w0.2: U14.1 v1(34.8,33.63)
  BOTTOM w0.2: C45.1 36.2,33 35.57,33.63 v1(34.8,33.63) R31.2
  BOTTOM w0.3: C45.1 36.2,32.31 36.21,32.29 R70.2 36.21,30.81 36.2,30.8 R69.1
N797593: length 7.5
  TOP w0.3: R27.1 36,32 35.3,31.3 34.3,31.3 33.85,30.85 U14.5 v1(33.85,28.87)
  BOTTOM w0.3: R31.1 34.8,29.82 v1(33.85,28.87)
N797877: length 3.6
  TOP w0.2: R24.1 C42.1 32.79,31.8 32.9,31.91 U14.3
N797953: length 4
  TOP w0.3: 25.4,30.6 C49.2 26.28,32 26.98,32.7 U15.3
N798113: length 5.5
  TOP w0.3: 25.4,29.6 v1(26.51,29.6)
  BOTTOM w0.3: C46.1 26.71,29.4 v1(26.51,29.6) 26.51,30.18 26.09,30.6 R23.1 R25.2
N804959: length 1.7
  BOTTOM w0.2: R20.1 29.84,32.27 30.11,32 C38.1
N809789: length 7.2
  TOP w0.3: R27.2 37.4,31 37.71,31.31 39.17,31.31 39.38,31.1 ; U18.2 39.35,31.06 39.38,31.1 ; 39.38,31.1 39.47,31.18 v1(41.19,31.18)
  BOTTOM w0.127: v1(41.19,31.18) 41.22,31.21 41.22,31.85 41.09,31.99 R71.1
N814486: length 6.2
  TOP w0.3: U18.4 v1(40.3,33.82)
  BOTTOM w0.2: R138.2 39.9,30.91 39.67,31.14 39.67,32.66 40,32.98 R71.2 40.62,33.49 v1(40.3,33.82)
N820703: length 2
  BOTTOM w0.127: R72.1 30.1,9.9 30.22,9.79 C51.1
N820707: length 3.4
  TOP w0.127: U21.4 27.7,8.82 27.79,8.91 28.01,8.91 28.02,8.9 v1(28.41,8.9)
  BOTTOM w0.127: R73.2 v1(28.41,8.9) R72.2
N820719: length 4.8
  TOP w0.127: U21.1 v1(29.6,11.42)
  BOTTOM w0.127: R73.1 27.66,11.5 28.06,11.9 29.12,11.9 v1(29.6,11.42)
N820731: length 7.5
  TOP w0.127: U19.1 v1(34.8,11.42)
  BOTTOM w0.127: R76.2 v1(34.8,11.42) 34.95,11.42 35.7,10.67 C54.1 36.2,9.76 36.21,9.75 R75.2 36.21,8.57 36.2,8.56 R74.1
N820747: length 4.2
  TOP w0.2: U22.4 v1(20.99,7.69) 20.49,7.69 20.44,7.74 PD3.1
  BOTTOM w0.2: v1(20.99,7.69) 20.99,8.31 21.28,8.59 R77.1
N820755: length 6.3
  TOP w0.127: C60.1 24.81,10.72 24.58,10.49 U22.1 v1(23.8,11.53)
  BOTTOM w0.2: R77.2 22.9,9.59 22.91,9.59 C52.2 23.5,10.52 23.8,10.82 v1(23.8,11.53)
N820875: length 1.9
  TOP w0.127: U19.5 v1(33.85,8.62)
  BOTTOM w0.127: v1(33.85,8.62) 33.86,8.61 R76.1
N821237: length 2.7
  TOP w0.127: U20.2 39.35,8.7 v1(39.65,8.99)
  BOTTOM w0.127: R80.1 40.54,9.54 40.54,9.08 40.46,8.99 v1(39.65,8.99)
N821249: length 3.6
  TOP w0.127: U20.4 40.3,11.05 v1(40.62,11.37) 40.62,11.76 40.6,11.78 40.6,11.97 40.33,12.24 R137.2
  BOTTOM w0.127: R80.2 v1(40.62,11.37)
N821379: length 3.9
  TOP w0.127: U21.3 26.88,10.49 26.11,9.72 C60.2 25.4,8.92 25.39,8.91 R82.1
N821555: length 4.3
  BOTTOM w0.2: C63.1 26.93,7.48 26.93,7.48 v1(26.54,7.48) 26.54,8.06 26.18,8.42 R83.1 R84.2
N887669: length 6
  TOP w0.2: U1.2 13.87,23.45 13.63,23.69 13.63,24.79 13.12,25.3 Y1.3 12.06,26.6 11.84,26.82 C1.2
N887689: length 8.5
  TOP w0.2: U1.3 13.55,22.95 13.07,23.43 13.07,24.05 12.82,24.3 10.37,24.3 10.06,23.99 Y1.1 10.06,21.98 10.23,21.81 C2.2
N910546: length 1.9
  TOP w0.2: U25.2 36.38,18.36 v1(35.5,18.36)
  BOTTOM w0.2: R117.1 v1(35.5,18.36)
N910558: length 4
  TOP w0.2: R139.2 33.1,19.45 33.2,19.35 U25.4 v1(35,19.35)
  BOTTOM w0.2: v1(35,19.35) 35.78,19.35 35.78,19.36 R117.2
N911064: length 4.1
  TOP w0.2: U30.4 35.65,25.87 35.92,26.14 v1(36.76,26.14)
  BOTTOM w0.2: R122.2 v1(36.76,26.14) R123.2
N911076: length 4.6
  TOP w0.2: C93.2 38.29,27.78 38.08,27.57 U30.1 37.55,28.44 v1(37.81,28.7)
  BOTTOM w0.2: v1(37.81,28.7) 37.51,28.4 37.51,28.18 37.62,28.07 R123.1
N911104: length 5.4
  TOP w0.2: PD5.1 v1(28.93,24.52) 28.98,24.47 29.8,24.47
  BOTTOM w0.2: C86.1 30.66,25.39 30.66,25.4 R127.1 29.19,25.4 28.98,25.18 28.98,24.99 28.93,24.95 v1(28.93,24.52)
N911112: length 6
  TOP w0.2: 31.86,27.48 32.56,27.48 32.77,27.7 C94.1 ; U31.1 v1(31.7,28.25)
  BOTTOM w0.2: R127.2 30.66,26.4 30.66,26.39 C86.2 31.29,27.84 v1(31.7,28.25)
N911614: length 1.8
  TOP w0.2: U29.2 36.36,21.92 v1(35.5,21.92)
  BOTTOM w0.2: R130.1 v1(35.5,21.92)
N911626: length 4.1
  TOP w0.2: v1(34.95,22.93) 33.44,22.93 33.06,22.54 33.03,22.54 32.98,22.49 R140.2
  BOTTOM w0.2: R130.2 35.76,22.92 35.75,22.93 v1(34.95,22.93)
N911704: length 5.6
  TOP w0.2: 41.24,22.93 41.24,24.85 40.62,25.47 R131.1 39.14,26 39.15,26 C93.1
N911756: length 4.2
  TOP w0.2: R132.1 33.39,25.94 33.4,25.94 C94.2 34.15,26.7 35.24,27.78 35.81,27.78
N911932: length 6.1
  TOP w0.2: R132.2 v1(34.47,24.41)
  BOTTOM w0.2: 36.12,24.75 35.41,24.75 35.07,24.41 v1(34.47,24.41) 34.47,25.08 34.12,25.43 R133.1 R134.2
N931500: length 20
  TOP w0.127: v1(46.2,27.8) 50.9,27.8 52.8,29.7 v1(52.8,32.5)
  BOTTOM w0.127: R90.2 43.4,32.61 43.41,32.59 C24.1 C23.1 43.91,30.6 44.41,30.1 LD2.1 45.4,29.1 45.7,28.8 45.7,28.49 45.6,28.39 R45.1 v1(46.2,27.8) R46.1 ; R47.1 v1(52.8,32.5)
N931828: length 6.4
  BOTTOM w0.127: LD2.2 45.4,33.04 45.3,33.14 45.3,33.3 45.7,33.7 48.9,33.7 49.36,33.24 Q5.3
N931876: length 12
  TOP w0.127: v1(43.41,28.5) 49.3,28.5 v1(51.12,30.32)
  BOTTOM w0.127: Q4.1 v1(51.12,30.32) ; R45.2 R48.2 43.4,28.39 43.41,28.4 v1(43.41,28.5) R49.1
N931880: length 2.4
  BOTTOM w0.127: R46.2 48.6,27.8 49.36,28.56 49.36,29.09
N931896: length 5.9
  BOTTOM w0.127: Q5.1 52.89,33.42 52.97,33.5 R47.2 54.7,33.5 55,33.2 55,31.7 54.5,31.2 R50.1
N932164: length 6.1
  BOTTOM w0.127: Q4.2 52.45,28.41 ; 52.45,28.41 53.1,29.06 53.1,31.3 52.89,31.51 Q5.2 ; 52.45,28.41 53.12,28.41 53.31,28.6 R51.1
N932356: length 8.6
  BOTTOM w0.127: R43.1 R38.1 46.8,21.29 46.4,21.69 LD1.1 45.6,23.5 C22.1 C21.1 R106.2
N932684: length 6
  BOTTOM w0.127: LD1.2 46.4,25.9 46.8,26.3 49.34,26.3 49.59,26.05 49.59,25.67 49.98,25.29 Q2.3
N932732: length 11.8
  TOP w0.127: v1(45.1,20.7) 49.3,20.7 51.7,23.1 v1(52.1,23.1)
  BOTTOM w0.127: Q3.1 53.04,23.1 v1(52.1,23.1) ; R38.2 v1(45.1,20.7) R9.2 R44.1
N932736: length 2.2
  BOTTOM w0.127: R43.2 49.1,20.8 49.53,21.23 49.53,21.36 49.59,21.42 49.59,21.8 49.98,22.19 Q3.3
N932752: length 6
  BOTTOM w0.127: R33.1 55.49,23.9 56.1,24.51 56.1,25.8 55.8,26.1 R34.2 54.31,26.1 54.19,26.22 Q2.1
N933020: length 5.9
  BOTTOM w0.127: R35.1 54.08,21.4 53.89,21.21 53.45,21.21 ; 53.45,21.21 Q3.2 ; 53.45,21.21 54.1,21.86 54.1,24.1 53.89,24.31 Q2.2
